# Altium PCB PCB-Mezzanine.PcbDoc (part 1 of 2)
Units mm, origin at the board's own origin, x right, y up, seen from the top; angles counter-clockwise.
Board outline 133.2 x 100 mm, 6 copper layers (Top Layer, Mid-Layer 1, Mid-Layer 2, Mid-Layer 3, Mid-Layer 4, Bottom Layer); 39 components, 252 nets, 1606 pads, 142 vias.
Unrouted connection lines stored in the file: 49.
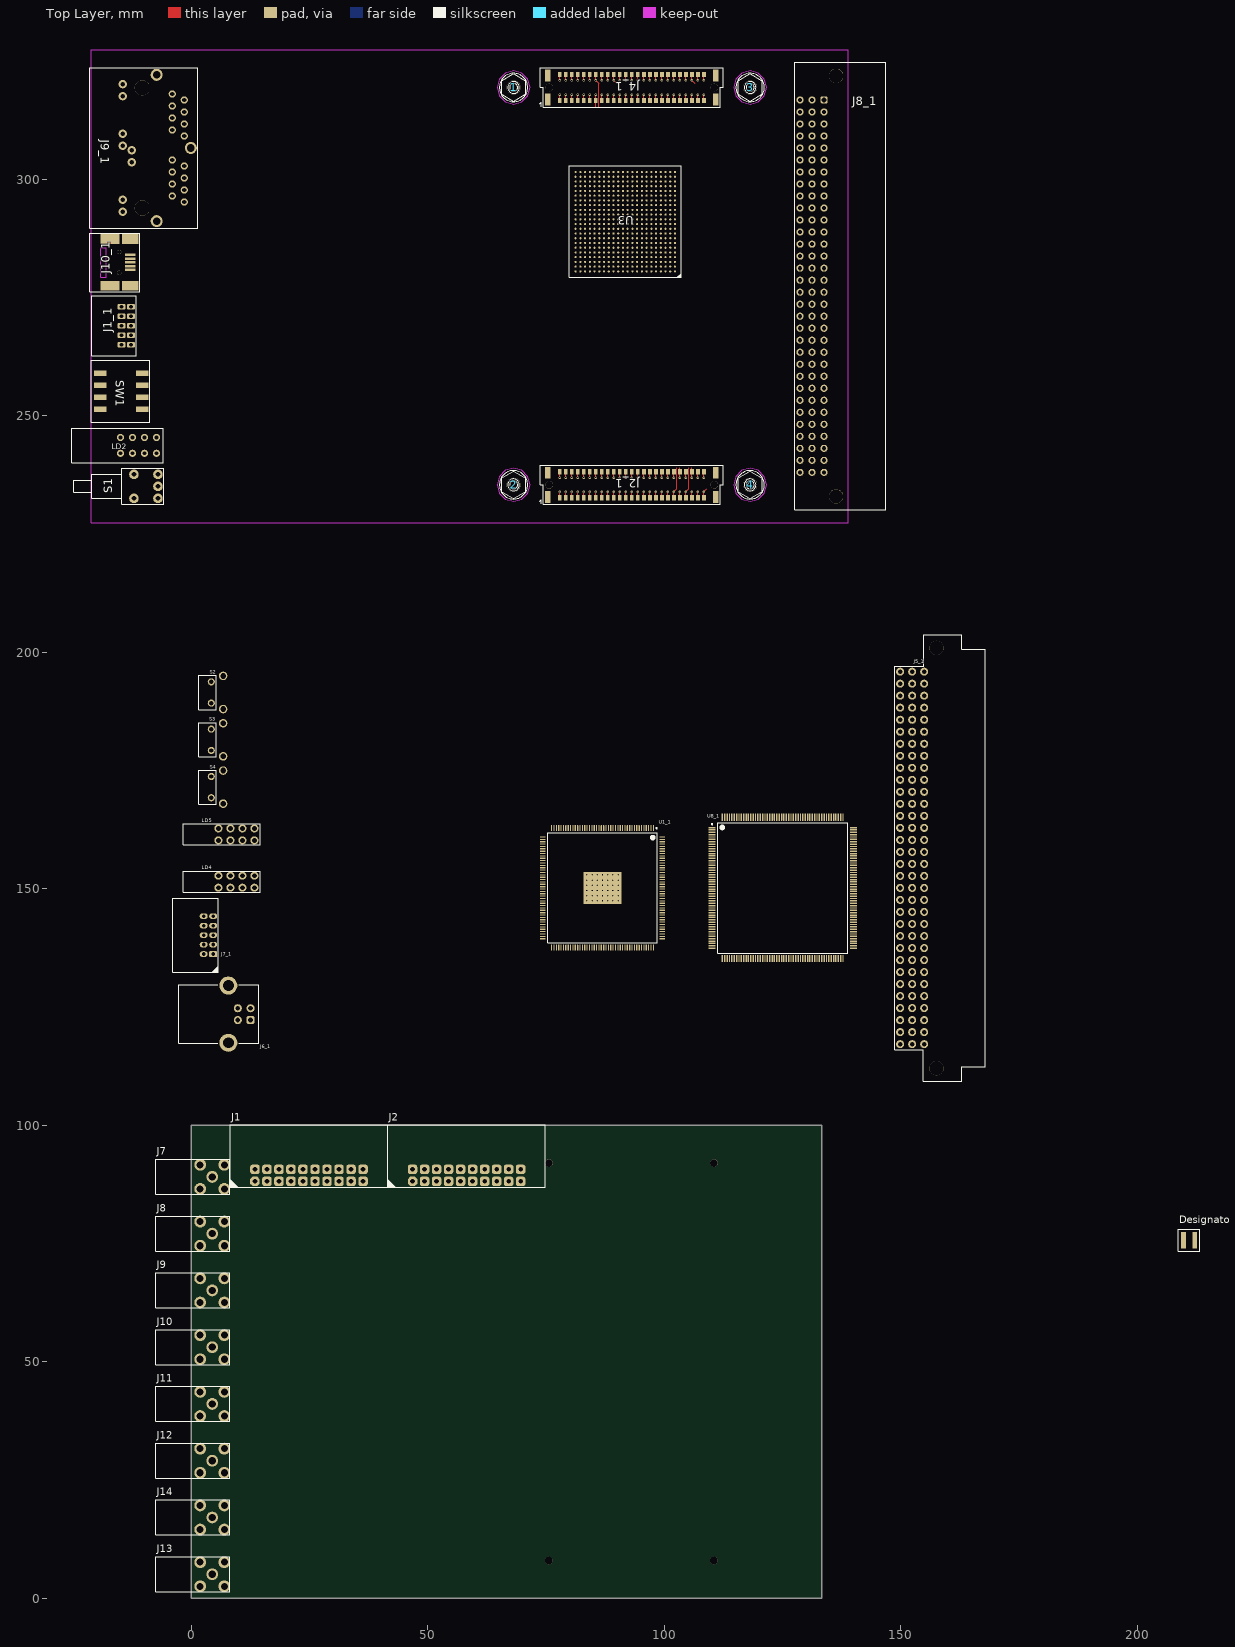
[diagram p0: Top Layer view]
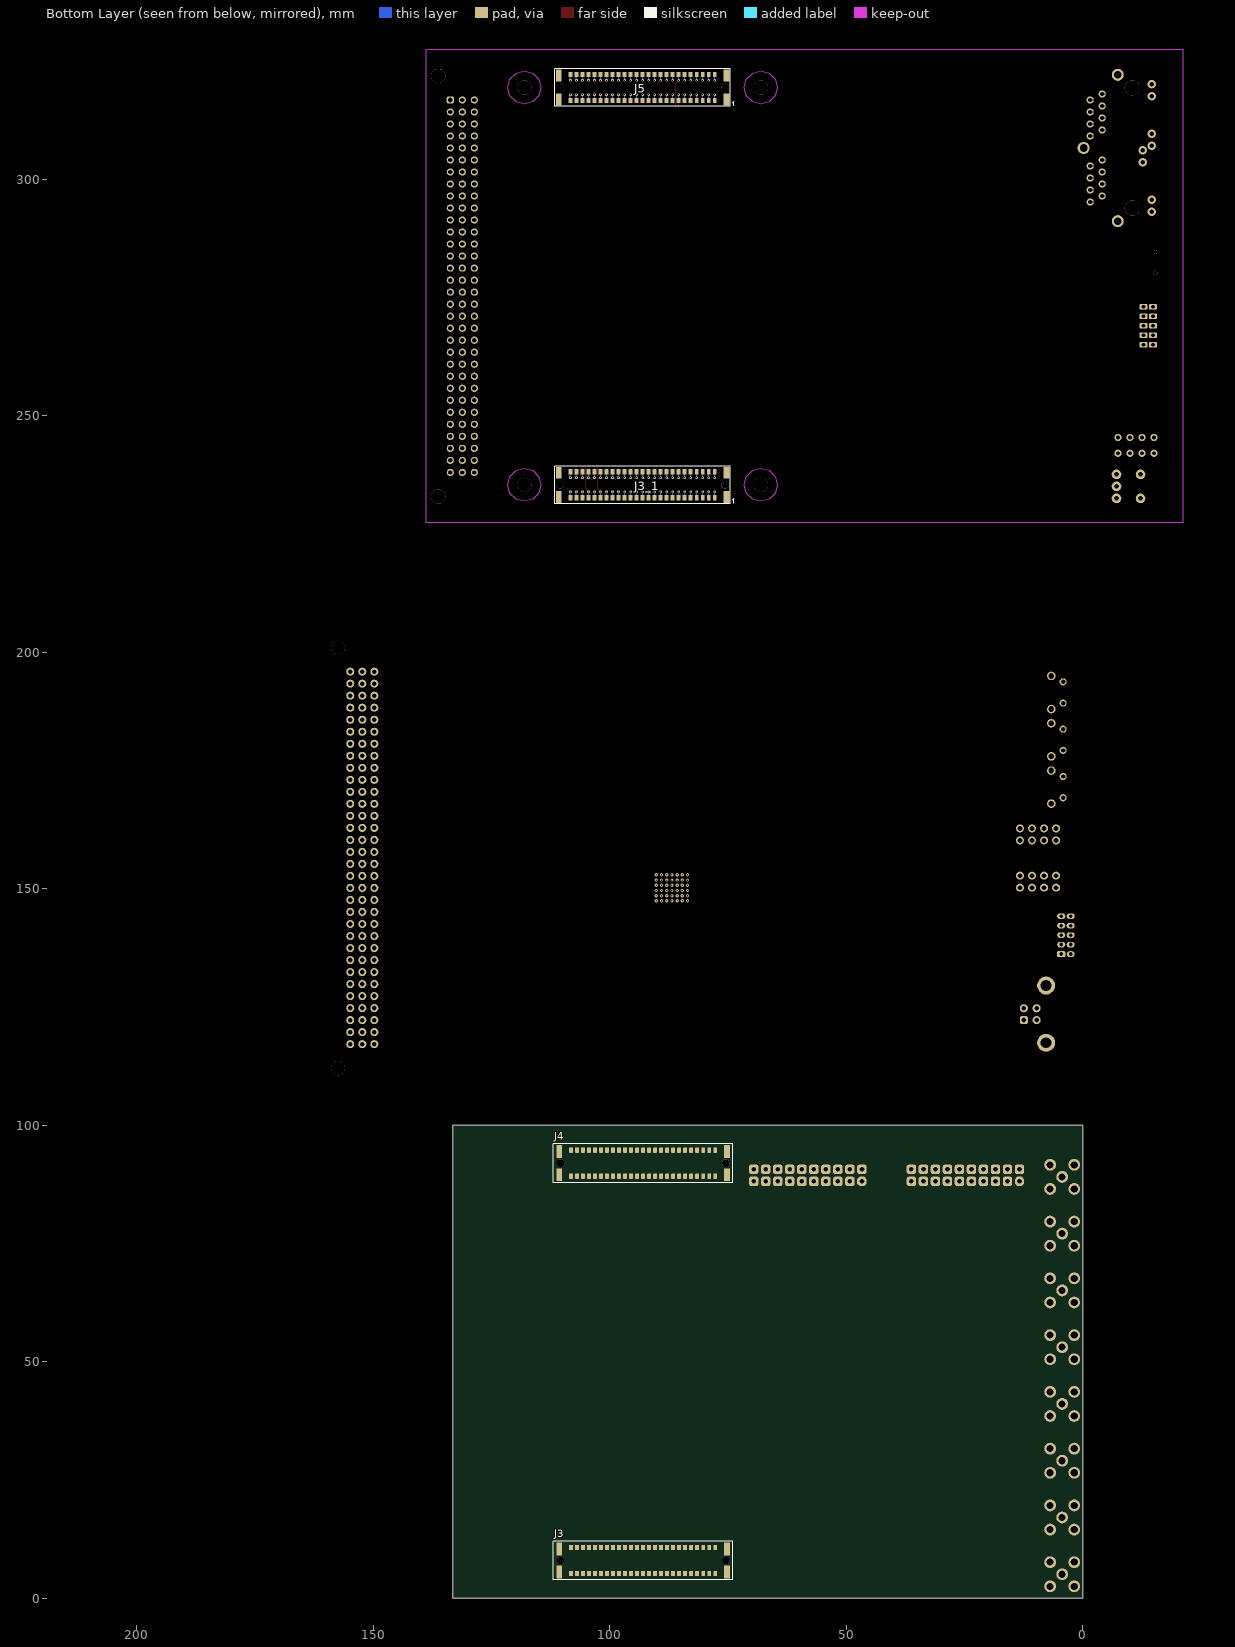
[diagram p1: Bottom Layer view, seen from below]
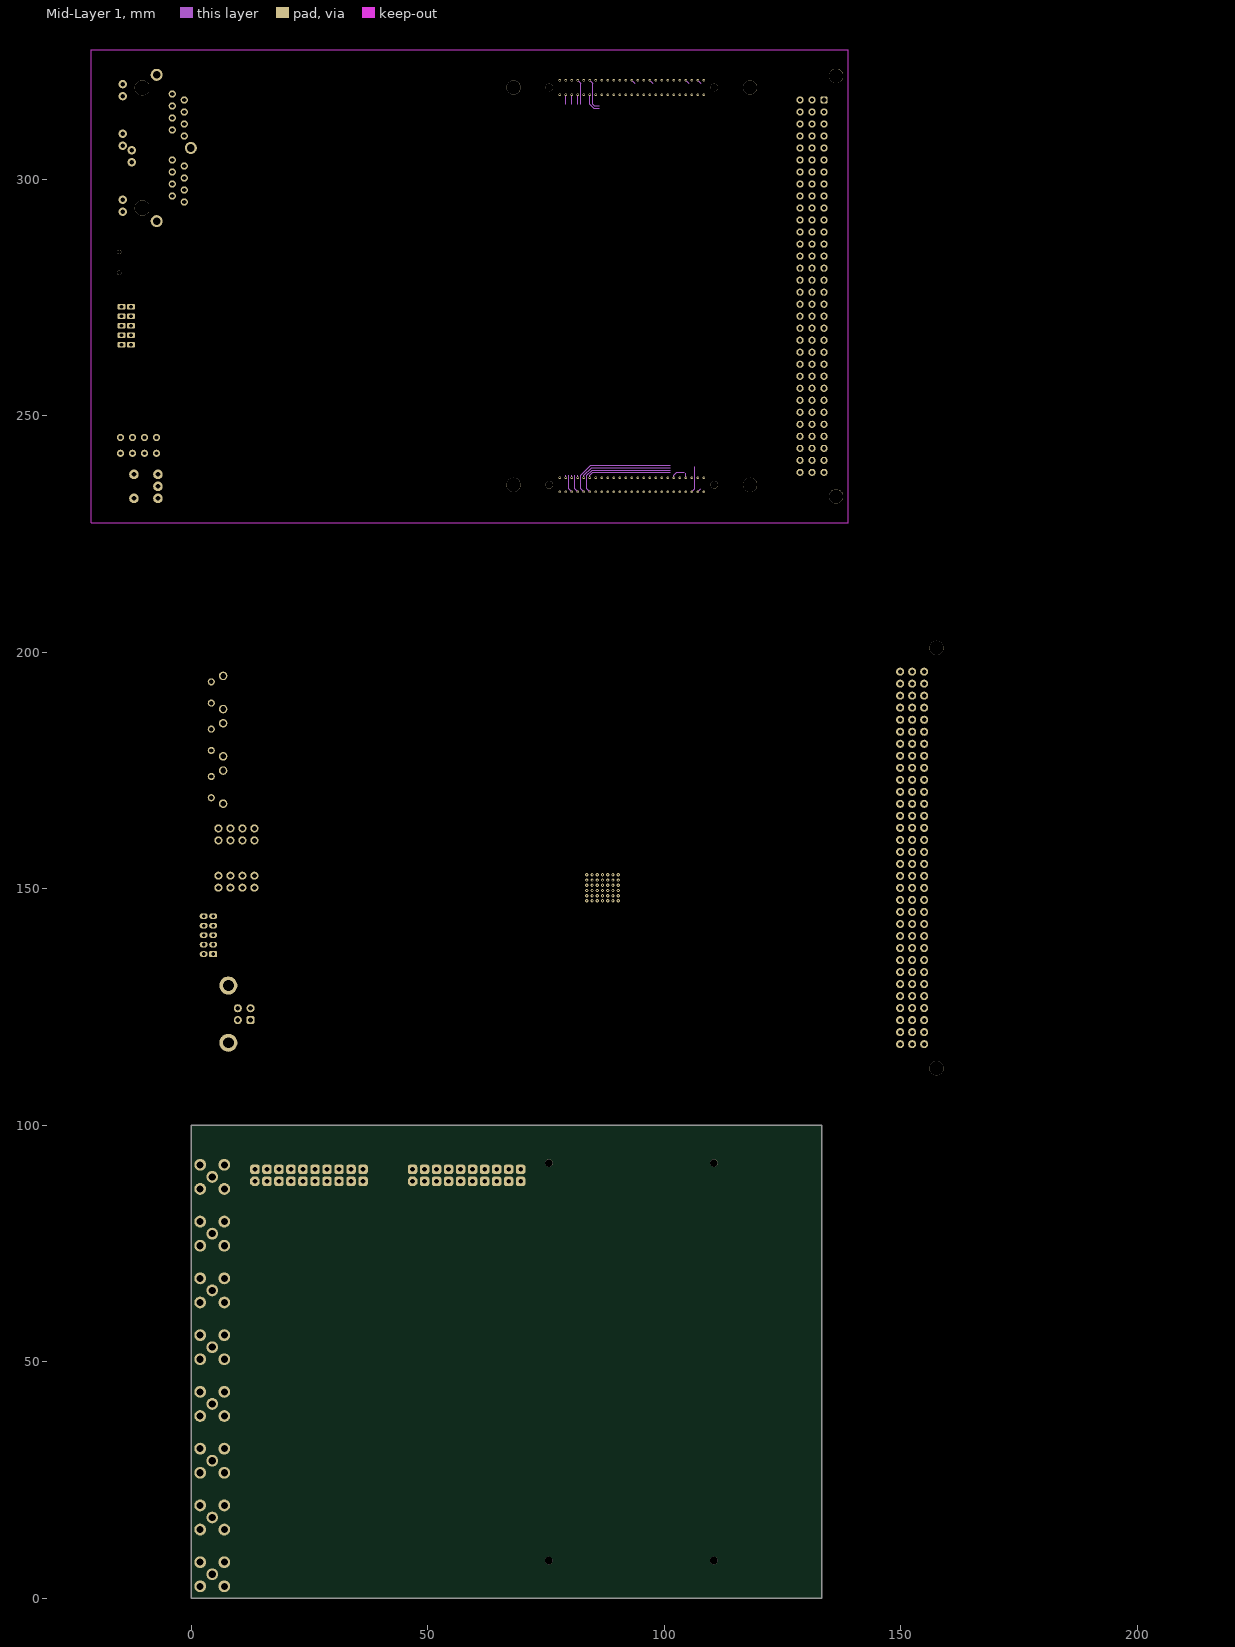
[diagram p2: Mid-Layer 1]
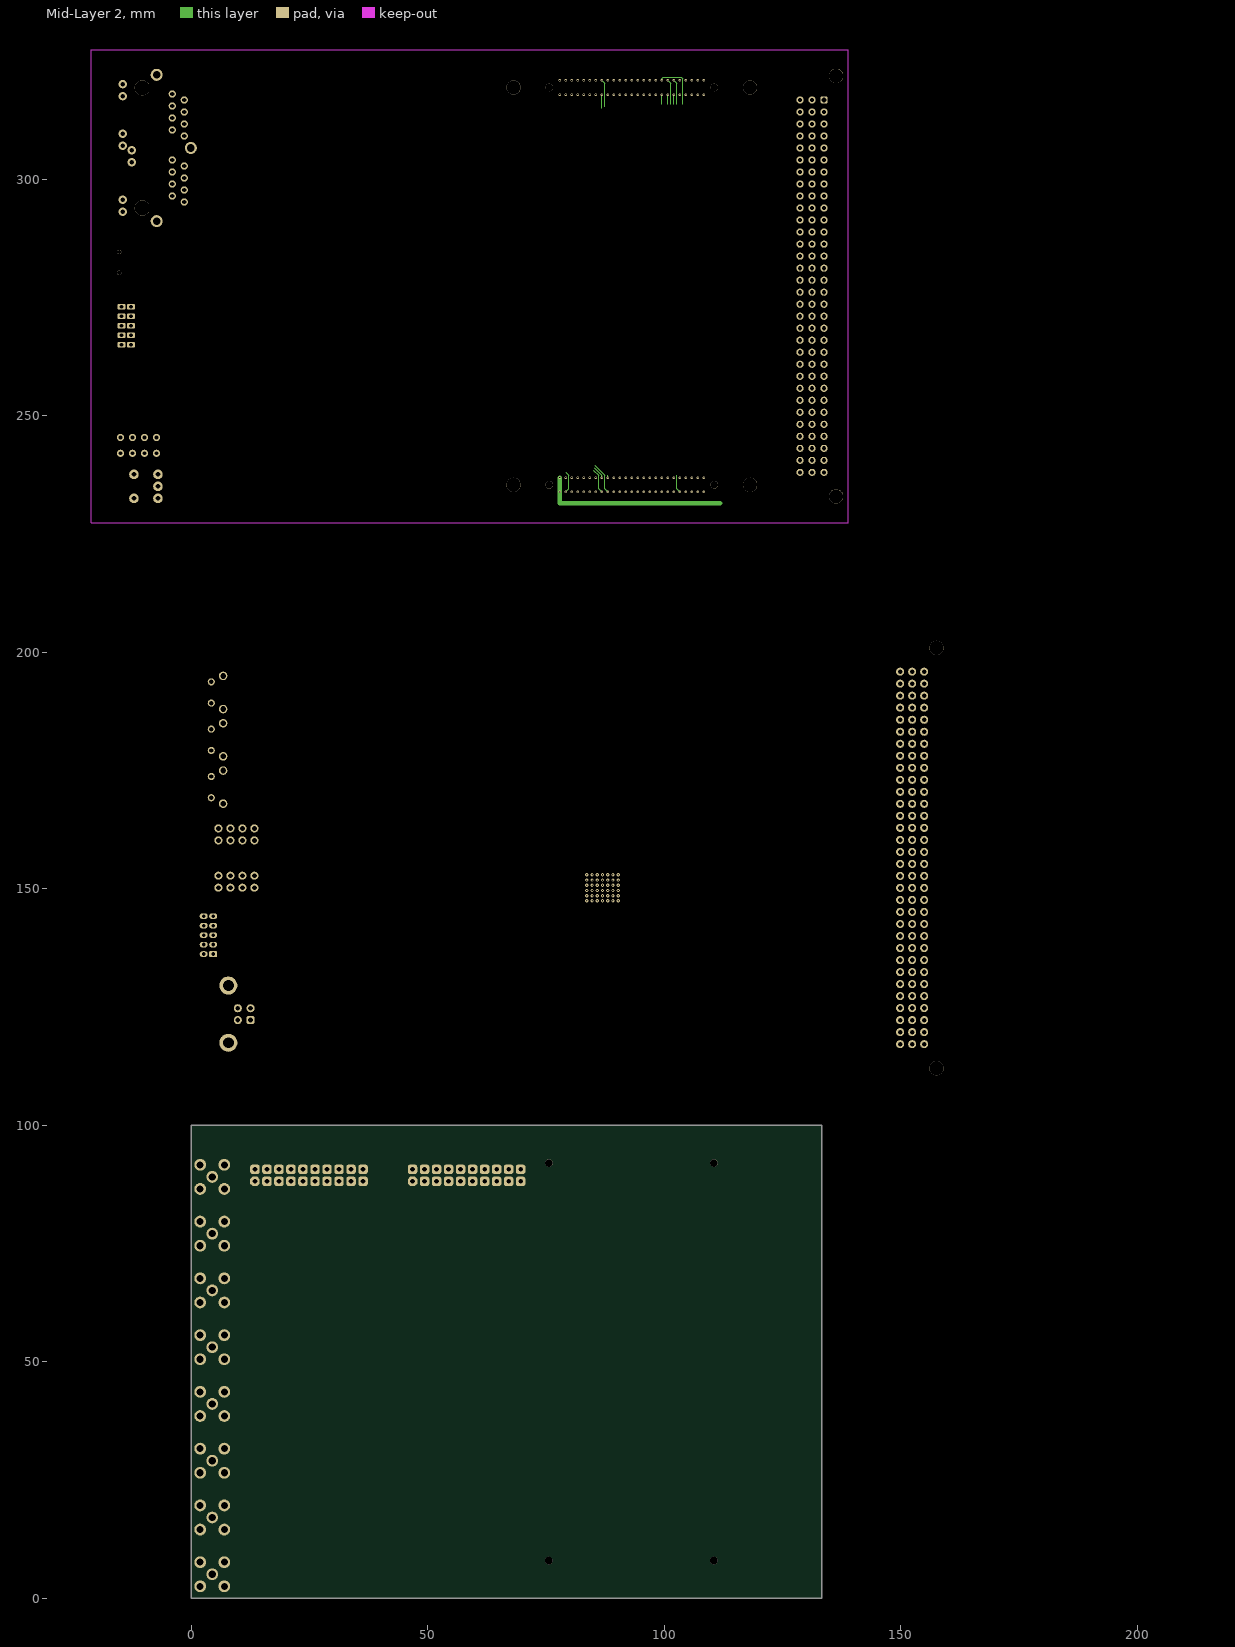
[diagram p3: Mid-Layer 2]
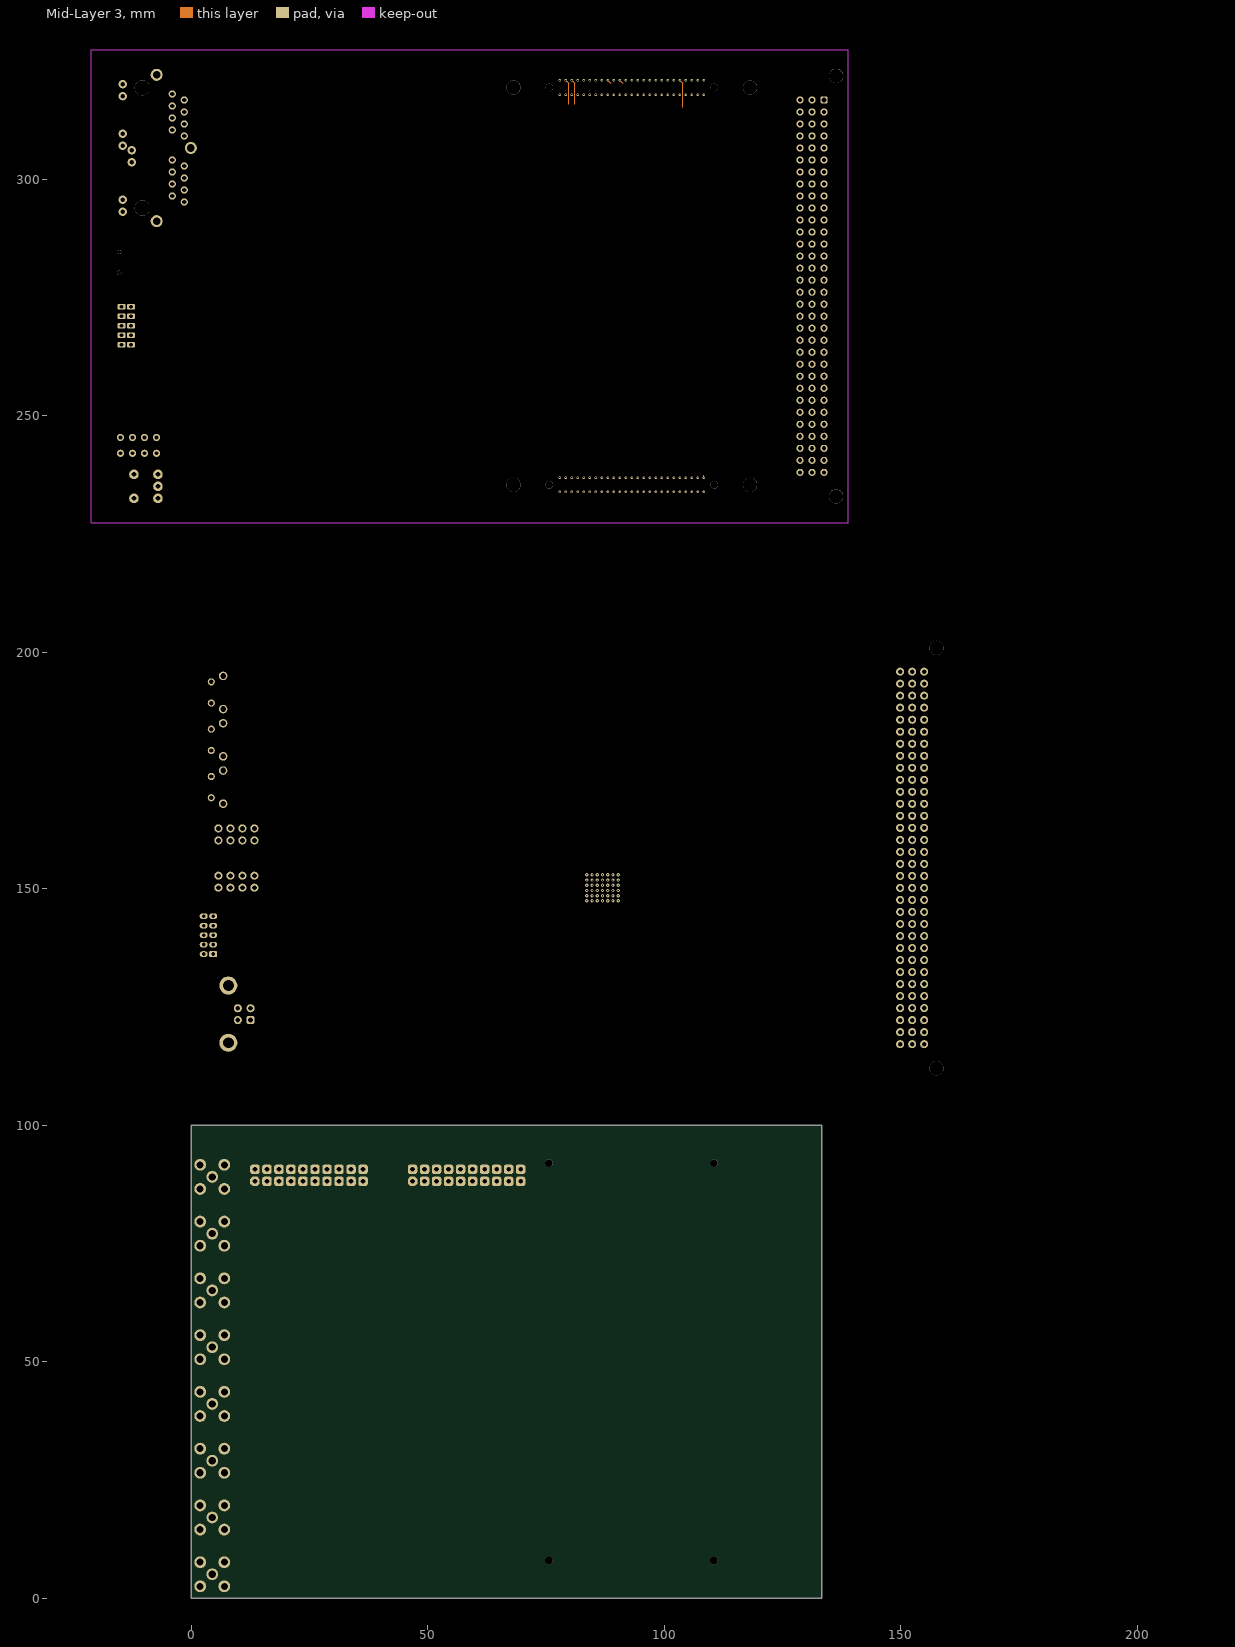
[diagram p4: Mid-Layer 3]
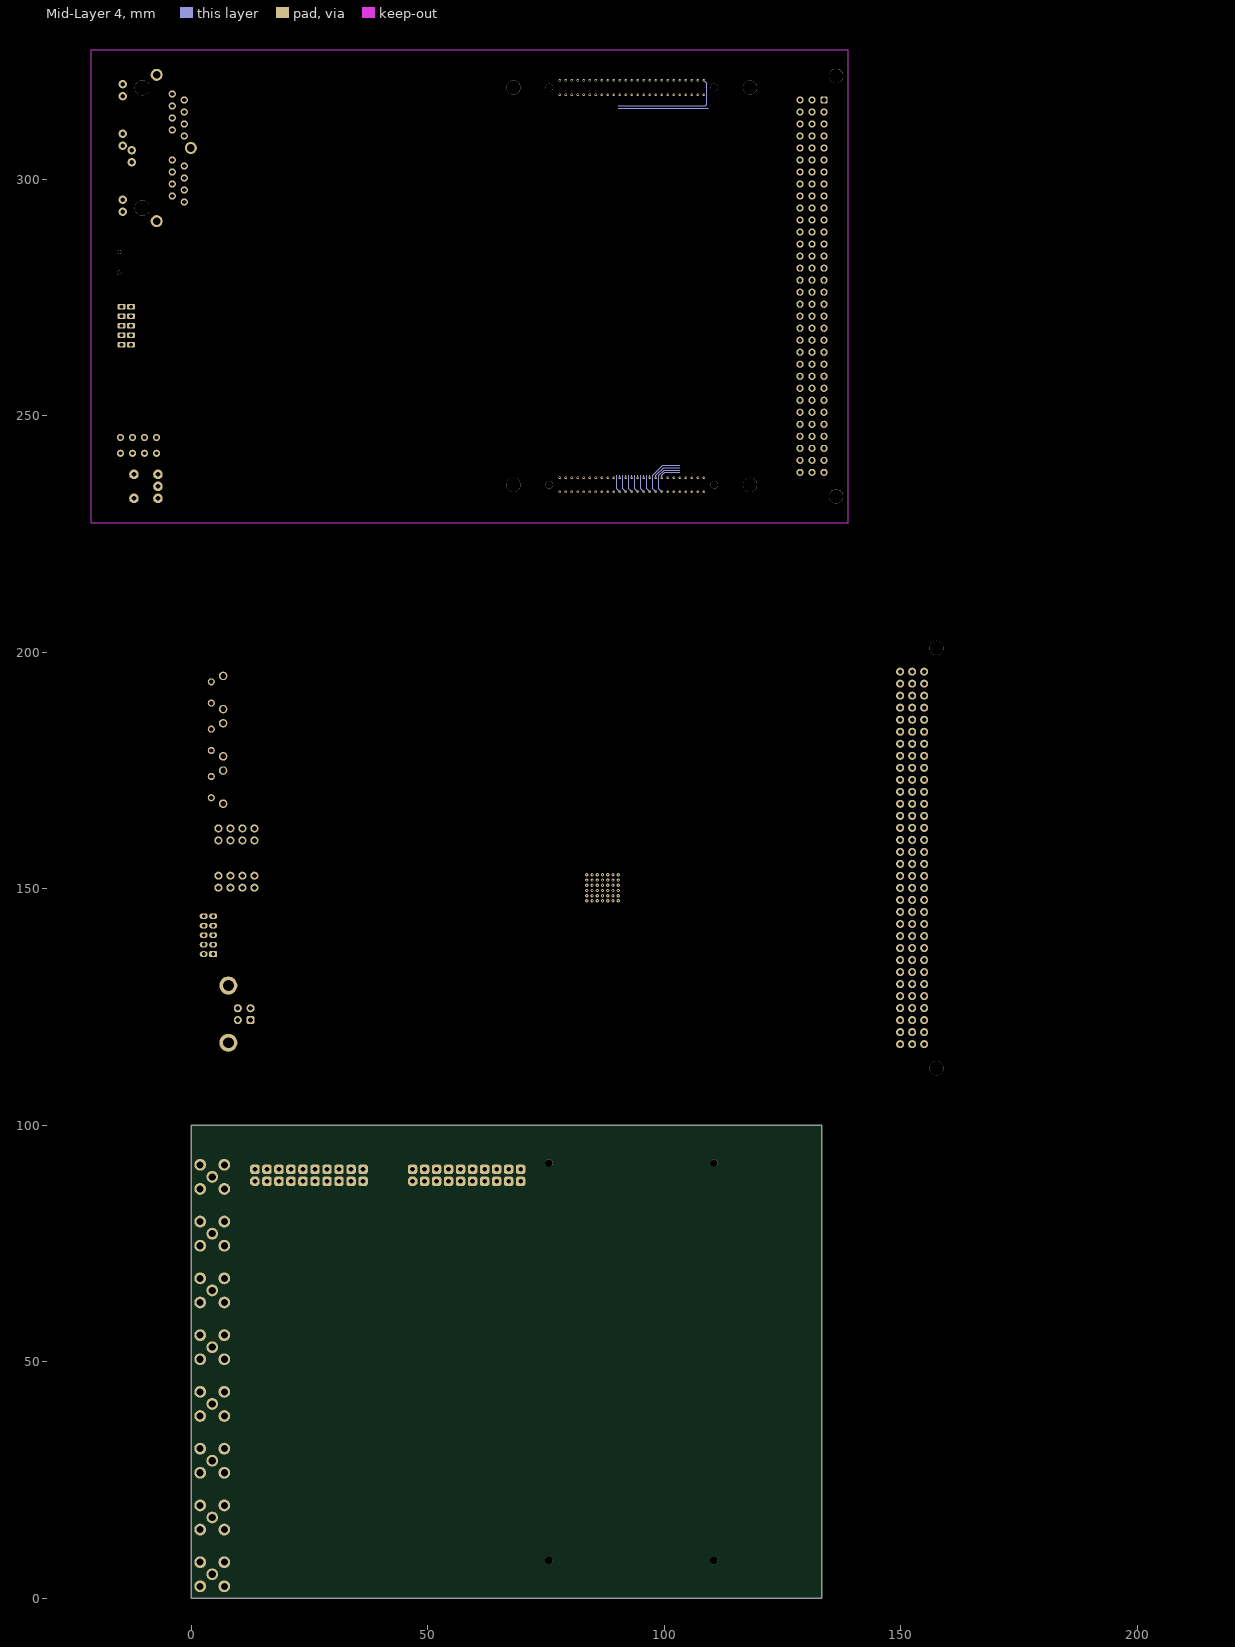
[diagram p5: Mid-Layer 4]

## Layer stack, top to bottom
Top Solder: solder mask 0.0102, Solder Resist, Dk 3.5
Top Layer: signal copper 0.0356
Dielectric 1: dielectric 0.32, FR-4, Dk 4.8
Mid-Layer 1: signal copper 0.0356
Dielectric2: dielectric 0.32, FR-4, Dk 4.8
Mid-Layer 2: signal copper 0.0356
Dielectric3: dielectric 0.32, FR-4, Dk 4.8
Mid-Layer 3: signal copper 0.0356
Dielectric4: dielectric 0.32, FR-4, Dk 4.8
Mid-Layer 4: signal copper 0.0356
Dielectric5: dielectric 0.32, FR-4, Dk 4.8
Bottom Layer: signal copper 0.0356
Bottom Solder: solder mask 0.0102, Solder Resist, Dk 3.5

## Board outline
0,0 133.2,0 133.2,100 0,100

## Design rules (kind name [scope] priority, off if disabled: settings)
Clearance [All] p1: gap=0.254 ignorepadtopadclearanceinfootprint=FALSE except(0: Arc-Hole Track-Hole SMDPad-Hole THPad-Hole Via-Hole Fill-Hole Poly-Hole Region-Hole Text-Hole)
DiffPairsRouting [All] p1: maxlimit=0.254 minlimit=0.254 mostfreqgap=0.254 toplayer_minwidth=0.381 toplayer_maxwidth=0.381 toplayer_prefwidth=0.381 midlayer1_minwidth=0.381 midlayer1_maxwidth=0.381 midlayer1_prefwidth=0.381 midlayer2_minwidth=0.381 midlayer2_maxwidth=0.381 midlayer2_prefwidth=0.381 midlayer3_minwidth=0.381 midlayer3_maxwidth=0.381 midlayer3_prefwidth=0.381 midlayer4_minwidth=0.381 midlayer4_maxwidth=0.381 midlayer4_prefwidth=0.381 bottomlayer_minwidth=0.381 bottomlayer_maxwidth=0.381 bottomlayer_prefwidth=0.381 maxuncoupledlength=12.7
PolygonConnect [All] p1: connectstyle=Relief reliefconductorwidth=0.254 reliefentries=4 polygonreliefangle="90 Angle" airgapwidth=0.254
RoutingVias [All] p1: holewidth=0.711 width=1.27 viastyle="Through Hole" minholewidth=0.4 minwidth=0.7 maxholewidth=0.4 maxwidth=0.7
SolderMaskExpansion [All] p1: expansion=0.102
Width [All] p1: maxlimit=0.254 minlimit=0.254 preferedwidth=0.254
29 further rules are at their usual default settings.

## Classes and differential pairs
component class Supply_0: R137 R138 R139 R140 R141 TP1 TP2 U34
component class DAC_0: J7 J8 J9 J10 J11 J12 J13 J14 R121 R122 R123 R124 R125 R126 R127 R128 R129 R130 R131 R132 R133 R134 R135 R136 U30 U33
component class Connector_0: J1 J2 J3 J4
component class AD_3: U24
differential pair MEAS_19: +MEAS_19_P -MEAS_19_N
differential pair MEAS_18: +MEAS_18_P -MEAS_18_N
differential pair MEAS_17: +MEAS_17_P -MEAS_17_N
differential pair MEAS_16: +MEAS_16_P -MEAS_16_N
differential pair MEAS_15: +MEAS_15_P -MEAS_15_N
differential pair MEAS_14: +MEAS_14_P -MEAS_14_N
differential pair MEAS_13: +MEAS_13_P -MEAS_13_N
differential pair MEAS_12: +MEAS_12_P -MEAS_12_N
differential pair MEAS_11: +MEAS_11_P -MEAS_11_N
differential pair MEAS_10: +MEAS_10_P -MEAS_10_N
differential pair MEAS_9: +MEAS_9_P -MEAS_9_N
differential pair MEAS_8: +MEAS_8_P -MEAS_8_N
differential pair MEAS_7: +MEAS_7_P -MEAS_7_N
differential pair MEAS_6: +MEAS_6_P -MEAS_6_N
differential pair MEAS_5: +MEAS_5_P -MEAS_5_N
differential pair MEAS_4: +MEAS_4_P -MEAS_4_N
differential pair MEAS_3: +MEAS_3_P -MEAS_3_N
differential pair MEAS_2: +MEAS_2_P -MEAS_2_N
differential pair MEAS_1: +MEAS_1_P -MEAS_1_N
differential pair MEAS_0: +MEAS_0_P -MEAS_0_N

## Components (designator, comment, footprint, x,y, rotation, side; value= is the part's Value field where it differs from the comment)
1 "" "UNCONNECTED NUT M2.5" 68.104,319.399 r0 top locked
2 "" "UNCONNECTED NUT M2.5" 68.104,235.399 r0 top locked
3 "" "UNCONNECTED NUT M2.5" 118.104,319.399 r0 top locked
4 "" "UNCONNECTED NUT M2.5" 118.104,235.399 r0 top locked
Designator24 "Comment" XFL4020 210.9,75.7 r180 top
J1 "61202021621" "FlatCable2x10 2.54MM RIGHT ANGLE TH" 24.85,89.43 r180 top
J1_1 "{Value}" CONN2X5-2MM-FCI-COUDE -12.776,265.029 r90 top
J2 "61202021621" "FlatCable2x10 2.54MM RIGHT ANGLE TH" 58.17,89.43 r180 top
J2_1 "{Value}" ERNI-SMC-50P-FD_ERNI-SMC-50P-FD(Primary) 93.104,235.4 r90 top locked
J3 "ERNI SMC-Q50-SMD-BA" "ERNI SMC-Q50-SMD-BA" 93,8 r180 bottom locked
J3_1 "{Value}" ERNI-SMC-50P-MD_ERNI-SMC-50P-MD(Primary) 93.104,235.4 r270 bottom locked
J4 "ERNI SMC-Q50-SMD-BA" "ERNI SMC-Q50-SMD-BA" 93,92 r180 bottom locked
J4_1 "{Value}" ERNI-SMC-50P-FD_ERNI-SMC-50P-FD(Primary) 93.104,319.398 r90 top locked
J5 "{Value}" ERNI-SMC-50P-MD_ERNI-SMC-50P-MD(Primary) 93.104,319.398 r270 bottom locked
J5_1 "09031966921" "DIN41612 MALE 3X32 ABC R90" 167.6,156.5 r270 top (schematic designator J5)
J6_1 "UE27-BC54-130" "USB-B TH AMPHENOL UE27-BC54-130" -2.5,123.5 r270 top (schematic designator J6)
J7 "CONSMA002-G" "SMA TH Right Angle Linx CONSMA002" 4.4,89.1 r0 top locked
J7_1 "98464-G61-10ULF" "FlatCable2x5 2MM Right Angle TH FCI 98614-G61-10ULF" 3.6,140.2 r270 top (schematic designator J7)
J8 "CONSMA002-G" "SMA TH Right Angle Linx CONSMA002" 4.4,77.1 r0 top locked
J8_1 "" CONN3X32_DIN41612-3X32FC(Primary) 133.744,316.769 r0 top
J9 "CONSMA002-G" "SMA TH Right Angle Linx CONSMA002" 4.4,65.1 r0 top locked
J9_1 "" RJ45-PULSE-J8064D628ANL -21.196,306.609 r270 top
J10 "CONSMA002-G" "SMA TH Right Angle Linx CONSMA002" 4.4,53.1 r0 top locked
J10_1 "USB Mini" USB-MINI-B-SMD -21.176,282.429 r0 top
J11 "CONSMA002-G" "SMA TH Right Angle Linx CONSMA002" 4.4,41.1 r0 top locked
J12 "CONSMA002-G" "SMA TH Right Angle Linx CONSMA002" 4.4,29.1 r0 top locked
J13 "CONSMA002-G" "SMA TH Right Angle Linx CONSMA002" 4.4,5.1 r0 top locked
J14 "CONSMA002-G" "SMA TH Right Angle Linx CONSMA002" 4.4,17.1 r0 top locked
LD2 "User Led" LED-569-010X-XXX -21.196,243.744 r0 top
LD4 "568-0721-111F" "LED Dialight 568-0721-111" 5.7,151.5 r0 top
LD5 "568-0721-111F" "LED Dialight 568-0721-111" 5.7,161.5 r0 top
S1 "Reset Button" PUSHBUTTON-03_PUSHBUTT-SH3-01(Primary) -7.08,232.544 r90 top
S2 "FSMRA4JH04" "Push Button C7.1x3.7 TE FSMRA4JH" 1.6,191.5 r270 top
S3 "FSMRA4JH04" "Push Button C7.1x3.7 TE FSMRA4JH" 1.6,181.5 r270 top
S4 "FSMRA4JH04" "Push Button C7.1x3.7 TE FSMRA4JH" 1.6,171.5 r270 top
SW1 "" SW-CTS-193-4MS -19.291,258.984 r270 top
U1_1 "TMS320F28377SPTPT" "PQFP176 P0.5 C24.2X24.2 H1.5" 86.9,150.2 r270 top (schematic designator U1)
U3 "XC6SLX45 / 100 / 150" "BGA23X23-FG484_XC6SLX150 FGG484(Primary)" 102.224,280.529 r180 top
U8_1 "XC2C256-7PQG208C" "PQFP208 P0.5 C28.0X28.0 H3.7" 125,150.2 r0 top (schematic designator U8)

## Footprints (in the part's own frame and the unit in brackets; to place one, negate y for a bottom-side part, rotate by r counter-clockwise, add the part's x,y. Pads: shape width x height; smd on the part's side, far side on the other; paste and mask are expansions set on the pad)
"BGA23X23-FG484_XC6SLX150 FGG484(Primary)" [mm]
  round 0.45 smd: A1(0,0) A2(1,0) A3(2,0) A4(3,0) A5(4,0) A6(5,0) A7(6,0) A8(7,0) A9(8,0) A10(9,0) A11(10,0) A12(11,0) A13(12,0) A14(13,0) A15(14,0) A16(15,0) A17(16,0) A18(17,0) A19(18,0) A20(19,0) A21(20,0) A22(21,0) AA1(0,-20) AA2(1,-20) AA3(2,-20) AA4(3,-20) AA5(4,-20) AA6(5,-20) AA7(6,-20) AA8(7,-20) AA9(8,-20) AA10(9,-20) AA11(10,-20) AA12(11,-20) AA13(12,-20) AA14(13,-20) AA15(14,-20) AA16(15,-20) AA17(16,-20) AA18(17,-20) AA19(18,-20) AA20(19,-20) AA21(20,-20) AA22(21,-20) AB1(0,-21) AB2(1,-21) AB3(2,-21) AB4(3,-21) AB5(4,-21) AB6(5,-21) AB7(6,-21) AB8(7,-21) AB9(8,-21) AB10(9,-21) AB11(10,-21) AB12(11,-21) AB13(12,-21) AB14(13,-21) AB15(14,-21) AB16(15,-21) AB17(16,-21) AB18(17,-21) AB19(18,-21) AB20(19,-21) AB21(20,-21) AB22(21,-21) B1(0,-1) B2(1,-1) B3(2,-1) B4(3,-1) B5(4,-1) B6(5,-1) B7(6,-1) B8(7,-1) B9(8,-1) B10(9,-1) B11(10,-1) B12(11,-1) B13(12,-1) B14(13,-1) B15(14,-1) B16(15,-1) B17(16,-1) B18(17,-1) B19(18,-1) B20(19,-1) B21(20,-1) B22(21,-1) C1(0,-2) C2(1,-2) C3(2,-2) C4(3,-2) C5(4,-2) C6(5,-2) C7(6,-2) C8(7,-2) C9(8,-2) C10(9,-2) C11(10,-2) C12(11,-2) C13(12,-2) C14(13,-2) C15(14,-2) C16(15,-2) C17(16,-2) C18(17,-2) C19(18,-2) C20(19,-2) C21(20,-2) C22(21,-2) D1(0,-3) D2(1,-3) D3(2,-3) D4(3,-3) D5(4,-3) D6(5,-3) D7(6,-3) D8(7,-3) D9(8,-3) D10(9,-3) D11(10,-3) D12(11,-3) D13(12,-3) D14(13,-3) D15(14,-3) D16(15,-3) D17(16,-3) D18(17,-3) D19(18,-3) D20(19,-3) D21(20,-3) D22(21,-3) E1(0,-4) E2(1,-4) E3(2,-4) E4(3,-4) E5(4,-4) E6(5,-4) E7(6,-4) E8(7,-4) E9(8,-4) E10(9,-4) E11(10,-4) E12(11,-4) E13(12,-4) E14(13,-4) E15(14,-4) E16(15,-4) E17(16,-4) E18(17,-4) E19(18,-4) E20(19,-4) E21(20,-4) E22(21,-4) F1(0,-5) F2(1,-5) F3(2,-5) F4(3,-5) F5(4,-5) F6(5,-5) F7(6,-5) F8(7,-5) F9(8,-5) F10(9,-5) F11(10,-5) F12(11,-5) F13(12,-5) F14(13,-5) F15(14,-5) F16(15,-5) F17(16,-5) F18(17,-5) F19(18,-5) F20(19,-5) F21(20,-5) F22(21,-5) G1(0,-6) G2(1,-6) G3(2,-6) G4(3,-6) G5(4,-6) G6(5,-6) G7(6,-6) G8(7,-6) G9(8,-6) G10(9,-6) G11(10,-6) G12(11,-6) G13(12,-6) G14(13,-6) G15(14,-6) G16(15,-6) G17(16,-6) G18(17,-6) G19(18,-6) G20(19,-6) G21(20,-6) G22(21,-6) H1(0,-7) H2(1,-7) H3(2,-7) H4(3,-7) H5(4,-7) H6(5,-7) H7(6,-7) H8(7,-7) H9(8,-7) H10(9,-7) H11(10,-7) H12(11,-7) H13(12,-7) H14(13,-7) H15(14,-7) H16(15,-7) H17(16,-7) H18(17,-7) H19(18,-7) H20(19,-7) H21(20,-7) H22(21,-7) J1(0,-8) J2(1,-8) J3(2,-8) J4(3,-8) J5(4,-8) J6(5,-8) J7(6,-8) J8(7,-8) J9(8,-8) J10(9,-8) J11(10,-8) J12(11,-8) J13(12,-8) J14(13,-8) J15(14,-8) J16(15,-8) J17(16,-8) J18(17,-8) J19(18,-8) J20(19,-8) J21(20,-8) J22(21,-8) K1(0,-9) K2(1,-9) K3(2,-9) K4(3,-9) K5(4,-9) K6(5,-9) K7(6,-9) K8(7,-9) K9(8,-9) K10(9,-9) K11(10,-9) K12(11,-9) K13(12,-9) K14(13,-9) K15(14,-9) K16(15,-9) K17(16,-9) K18(17,-9) K19(18,-9) K20(19,-9) K21(20,-9) K22(21,-9) L1(0,-10) L2(1,-10) L3(2,-10) L4(3,-10) L5(4,-10) L6(5,-10) L7(6,-10) L8(7,-10) L9(8,-10) L10(9,-10) L11(10,-10) L12(11,-10) L13(12,-10) L14(13,-10) L15(14,-10) L16(15,-10) L17(16,-10) L18(17,-10) L19(18,-10) L20(19,-10) L21(20,-10) L22(21,-10) M1(0,-11) M2(1,-11) M3(2,-11) M4(3,-11) M5(4,-11) M6(5,-11) M7(6,-11) M8(7,-11) M9(8,-11) M10(9,-11) M11(10,-11) M12(11,-11) M13(12,-11) M14(13,-11) M15(14,-11) M16(15,-11) M17(16,-11) M18(17,-11) M19(18,-11) M20(19,-11) M21(20,-11) M22(21,-11) N1(0,-12) N2(1,-12) N3(2,-12) N4(3,-12) N5(4,-12) N6(5,-12) N7(6,-12) N8(7,-12) N9(8,-12) N10(9,-12) N11(10,-12) N12(11,-12) N13(12,-12) N14(13,-12) N15(14,-12) N16(15,-12) N17(16,-12) N18(17,-12) N19(18,-12) N20(19,-12) N21(20,-12) N22(21,-12) P1(0,-13) P2(1,-13) P3(2,-13) P4(3,-13) P5(4,-13) P6(5,-13) P7(6,-13) P8(7,-13) P9(8,-13) P10(9,-13) P11(10,-13) P12(11,-13) P13(12,-13) P14(13,-13) P15(14,-13) P16(15,-13) P17(16,-13) P18(17,-13) P19(18,-13) P20(19,-13) P21(20,-13) P22(21,-13) R1(0,-14) R2(1,-14) R3(2,-14) R4(3,-14) R5(4,-14) R6(5,-14) R7(6,-14) R8(7,-14) R9(8,-14) R10(9,-14) R11(10,-14) R12(11,-14) R13(12,-14) R14(13,-14) R15(14,-14) R16(15,-14) R17(16,-14) R18(17,-14) R19(18,-14) R20(19,-14) R21(20,-14) R22(21,-14) T1(0,-15) T2(1,-15) T3(2,-15) T4(3,-15) T5(4,-15) T6(5,-15) T7(6,-15) T8(7,-15) T9(8,-15) T10(9,-15) T11(10,-15) T12(11,-15) T13(12,-15) T14(13,-15) T15(14,-15) T16(15,-15) T17(16,-15) T18(17,-15) T19(18,-15) T20(19,-15) T21(20,-15) T22(21,-15) U1(0,-16) U2(1,-16) U3(2,-16) U4(3,-16) U5(4,-16) U6(5,-16) U7(6,-16) U8(7,-16) U9(8,-16) U10(9,-16) U11(10,-16) U12(11,-16) U13(12,-16) U14(13,-16) U15(14,-16) U16(15,-16) U17(16,-16) U18(17,-16) U19(18,-16) U20(19,-16) U21(20,-16) U22(21,-16) V1(0,-17) V2(1,-17) V3(2,-17) V4(3,-17) V5(4,-17) V6(5,-17) V7(6,-17) V8(7,-17) V9(8,-17) V10(9,-17) V11(10,-17) V12(11,-17) V13(12,-17) V14(13,-17) V15(14,-17) V16(15,-17) V17(16,-17) V18(17,-17) V19(18,-17) V20(19,-17) V21(20,-17) V22(21,-17) W1(0,-18) W2(1,-18) W3(2,-18) W4(3,-18) W5(4,-18) W6(5,-18) W7(6,-18) W8(7,-18) W9(8,-18) W10(9,-18) W11(10,-18) W12(11,-18) W13(12,-18) W14(13,-18) W15(14,-18) W16(15,-18) W17(16,-18) W18(17,-18) W19(18,-18) W20(19,-18) W21(20,-18) W22(21,-18) Y1(0,-19) Y2(1,-19) Y3(2,-19) Y4(3,-19) Y5(4,-19) Y6(5,-19) Y7(6,-19) Y8(7,-19) Y9(8,-19) Y10(9,-19) Y11(10,-19) Y12(11,-19) Y13(12,-19) Y14(13,-19) Y15(14,-19) Y16(15,-19) Y17(16,-19) Y18(17,-19) Y19(18,-19) Y20(19,-19) Y21(20,-19) Y22(21,-19)
  silkscreen extent -1.3,-22.3 22.3,1.3
CONN2X5-2MM-FCI-COUDE [mm]
  rrect50% 1.219x1.727 hole 0.8: 1(0,0) 2(0,2) 3(2,0) 4(2,2) 5(4,0) 6(4,2) 7(6,0) 8(6,2) 9(8,0) 10(8,2)
  silkscreen extent -2.3,-1.1 10.3,8.3
CONN3X32_DIN41612-3X32FC(Primary) [mil]
  rrect50% 60x60 hole 39.37: 1a(0,0)
  round 60 hole 35.43: 1b(-100,0) 1c(-200,0) 2a(0,-100) 2b(-100,-100) 2c(-200,-100) 3a(0,-200) 3b(-100,-200) 3c(-200,-200) 4a(0,-300) 4b(-100,-300) 4c(-200,-300) 5a(0,-400) 5b(-100,-400) 5c(-200,-400) 6a(0,-500) 6b(-100,-500) 6c(-200,-500) 7a(0,-600) 7b(-100,-600) 7c(-200,-600) 8a(0,-700) 8b(-100,-700) 8c(-200,-700) 9a(0,-800) 9b(-100,-800) 9c(-200,-800) 10a(0,-900) 10b(-100,-900) 10c(-200,-900) 11a(0,-1000) 11b(-100,-1000) 11c(-200,-1000) 12a(0,-1100) 12b(-100,-1100) 12c(-200,-1100) 13a(0,-1200) 13b(-100,-1200) 13c(-200,-1200) 14a(0,-1300) 14b(-100,-1300) 14c(-200,-1300) 15a(0,-1400) 15b(-100,-1400) 15c(-200,-1400) 16a(0,-1500) 16b(-100,-1500) 16c(-200,-1500) 17a(0,-1600) 17b(-100,-1600) 17c(-200,-1600) 18a(0,-1700) 18b(-100,-1700) 18c(-200,-1700) 19a(0,-1800) 19b(-100,-1800) 19c(-200,-1800) 20a(0,-1900) 20b(-100,-1900) 20c(-200,-1900) 21a(0,-2000) 21b(-100,-2000) 21c(-200,-2000) 22a(0,-2100) 22b(-100,-2100) 22c(-200,-2100) 23a(0,-2200) 23b(-100,-2200) 23c(-200,-2200) 24a(0,-2300) 24b(-100,-2300) 24c(-200,-2300) 25a(0,-2400) 25b(-100,-2400) 25c(-200,-2400) 26a(0,-2500) 26b(-100,-2500) 26c(-200,-2500) 27a(0,-2600) 27b(-100,-2600) 27c(-200,-2600) 28a(0,-2700) 28b(-100,-2700) 28c(-200,-2700) 29a(0,-2800) 29b(-100,-2800) 29c(-200,-2800) 30a(0,-2900) 30b(-100,-2900) 30c(-200,-2900) 31a(0,-3000) 31b(-100,-3000) 31c(-200,-3000) 32a(0,-3100) 32b(-100,-3100) 32c(-200,-3100)
  round 118.11 hole 118.11 paste-1000 mask-1000: 97(100,200) 98(100,-3300)
  silkscreen extent -244,-3412 512,312
"DIN41612 MALE 3X32 ABC R90" [mm] "DIN41612 MALE 3X32 ABC R90"
  round 3 hole 3 paste-25.4 mask-25.4: 0(-44.45,-10.1) 0(44.45,-10.1)
  round 1.7 hole 1: A1(-39.4,-12.7) A2(-36.86,-12.7) A3(-34.32,-12.7) A4(-31.78,-12.7) A5(-29.24,-12.7) A6(-26.7,-12.7) A7(-24.16,-12.7) A8(-21.62,-12.7) A9(-19.08,-12.7) A10(-16.54,-12.7) A11(-14,-12.7) A12(-11.46,-12.7) A13(-8.92,-12.7) A14(-6.38,-12.7) A15(-3.84,-12.7) A16(-1.3,-12.7) A17(1.24,-12.7) A18(3.78,-12.7) A19(6.32,-12.7) A20(8.86,-12.7) A21(11.4,-12.7) A22(13.94,-12.7) A23(16.48,-12.7) A24(19.02,-12.7) A25(21.56,-12.7) A26(24.1,-12.7) A27(26.64,-12.7) A28(29.18,-12.7) A29(31.72,-12.7) A30(34.26,-12.7) A31(36.8,-12.7) A32(39.34,-12.7) B1(-39.4,-15.24) B2(-36.86,-15.24) B3(-34.32,-15.24) B4(-31.78,-15.24) B5(-29.24,-15.24) B6(-26.7,-15.24) B7(-24.16,-15.24) B8(-21.62,-15.24) B9(-19.08,-15.24) B10(-16.54,-15.24) B11(-14,-15.24) B12(-11.46,-15.24) B13(-8.92,-15.24) B14(-6.38,-15.24) B15(-3.84,-15.24) B16(-1.3,-15.24) B17(1.24,-15.24) B18(3.78,-15.24) B19(6.32,-15.24) B20(8.86,-15.24) B21(11.4,-15.24) B22(13.94,-15.24) B23(16.48,-15.24) B24(19.02,-15.24) B25(21.56,-15.24) B26(24.1,-15.24) B27(26.64,-15.24) B28(29.18,-15.24) B29(31.72,-15.24) B30(34.26,-15.24) B31(36.8,-15.24) B32(39.34,-15.24) C1(-39.4,-17.78) C2(-36.86,-17.78) C3(-34.32,-17.78) C4(-31.78,-17.78) C5(-29.24,-17.78) C6(-26.7,-17.78) C7(-24.16,-17.78) C8(-21.62,-17.78) C9(-19.08,-17.78) C10(-16.54,-17.78) C11(-14,-17.78) C12(-11.46,-17.78) C13(-8.92,-17.78) C14(-6.38,-17.78) C15(-3.84,-17.78) C16(-1.3,-17.78) C17(1.24,-17.78) C18(3.78,-17.78) C19(6.32,-17.78) C20(8.86,-17.78) C21(11.4,-17.78) C22(13.94,-17.78) C23(16.48,-17.78) C24(19.02,-17.78) C25(21.56,-17.78) C26(24.1,-17.78) C27(26.64,-17.78) C28(29.18,-17.78) C29(31.72,-17.78) C30(34.26,-17.78) C31(36.8,-17.78) C32(39.34,-17.78)
  silkscreen extent -47.2,-18.9 47.2,0.2, body extent -47,-18.08 47,0, height 9.5
"ERNI SMC-Q50-SMD-BA" [mm] "Male 1.27 pitch 2x20 pin connector, 6.75 height"
  rect 1.2x2.7 smd: 0(-17.75,-2.45) 0(-17.75,2.45) 0(17.75,-2.45) 0(17.75,2.45)
  round 1.6 hole 1.6 unplated: 0(-17.45,0) 0(17.45,0)
  rrect25% 0.8x1.1 smd: a1(15.24,-2.75) a1(15.24,-2.75) a2(13.97,-2.75) a3(12.7,-2.75) a4(11.43,-2.75) a5(10.16,-2.75) a6(8.89,-2.75) a7(7.62,-2.75) a8(6.35,-2.75) a9(5.08,-2.75) a10(3.81,-2.75) a11(2.54,-2.75) a12(1.27,-2.75) a13(0,-2.75) a14(-1.27,-2.75) a15(-2.54,-2.75) a16(-3.81,-2.75) a17(-5.08,-2.75) a18(-6.35,-2.75) a19(-7.62,-2.75) a20(-8.89,-2.75) a21(-10.16,-2.75) a22(-11.43,-2.75) a23(-12.7,-2.75) a24(-13.97,-2.75) a25(-15.24,-2.75) b1(15.24,2.75) b1(15.24,2.75) b2(13.97,2.75) b3(12.7,2.75) b4(11.43,2.75) b5(10.16,2.75) b6(8.89,2.75) b7(7.62,2.75) b8(6.35,2.75) b9(5.08,2.75) b10(3.81,2.75) b11(2.54,2.75) b12(1.27,2.75) b13(0,2.75) b14(-1.27,2.75) b15(-2.54,2.75) b16(-3.81,2.75) b17(-5.08,2.75) b18(-6.35,2.75) b19(-7.62,2.75) b20(-8.89,2.75) b21(-10.16,2.75) b22(-11.43,2.75) b23(-12.7,2.75) b24(-13.97,2.75) b25(-15.24,2.75)
  silkscreen extent -19,-4.1 19,4.1, body extent -18.42,-3.5 18.41,3.5, height 6.8
ERNI-SMC-50P-FD_ERNI-SMC-50P-FD(Primary) [mm]
  rect 2.5x1.2 smd: 51(-2.55,17.75) 52(2.55,17.75) 53(-2.55,-17.75) 54(2.55,-17.75)
  round 1.6 hole 1.6 paste-25.4 mask-25.4: 55(0,17.45) 56(0,-17.45)
  rect 1.1x0.8 smd: a1(-2.75,15.24) a2(-2.75,13.97) a3(-2.75,12.7) a4(-2.75,11.43) a5(-2.75,10.16) a6(-2.75,8.89) a7(-2.75,7.62) a8(-2.75,6.35) a9(-2.75,5.08) a10(-2.75,3.81) a11(-2.75,2.54) a12(-2.75,1.27) a13(-2.75,0) a14(-2.75,-1.27) a15(-2.75,-2.54) a16(-2.75,-3.81) a17(-2.75,-5.08) a18(-2.75,-6.35) a19(-2.75,-7.62) a20(-2.75,-8.89) a21(-2.75,-10.16) a22(-2.75,-11.43) a23(-2.75,-12.7) a24(-2.75,-13.97) a25(-2.75,-15.24) b1(2.75,15.24) b2(2.75,13.97) b3(2.75,12.7) b4(2.75,11.43) b5(2.75,10.16) b6(2.75,8.89) b7(2.75,7.62) b8(2.75,6.35) b9(2.75,5.08) b10(2.75,3.81) b11(2.75,2.54) b12(2.75,1.27) b13(2.75,0) b14(2.75,-1.27) b15(2.75,-2.54) b16(2.75,-3.81) b17(2.75,-5.08) b18(2.75,-6.35) b19(2.75,-7.62) b20(2.75,-8.89) b21(2.75,-10.16) b22(2.75,-11.43) b23(2.75,-12.7) b24(2.75,-13.97) b25(2.75,-15.24)
  silkscreen extent -4.13,-19.37 4.13,19.45
ERNI-SMC-50P-MD_ERNI-SMC-50P-MD(Primary) [mm]
  rect 2.5x1.2 smd: 51(2.55,17.75) 52(-2.55,17.75) 53(2.55,-17.75) 54(-2.55,-17.75)
  round 1.6 hole 1.6 paste-25.4 mask-25.4: 55(0,17.45) 56(0,-17.45)
  rect 1.1x0.8 smd: a1(2.75,15.24) a2(2.75,13.97) a3(2.75,12.7) a4(2.75,11.43) a5(2.75,10.16) a6(2.75,8.89) a7(2.75,7.62) a8(2.75,6.35) a9(2.75,5.08) a10(2.75,3.81) a11(2.75,2.54) a12(2.75,1.27) a13(2.75,0) a14(2.75,-1.27) a15(2.75,-2.54) a16(2.75,-3.81) a17(2.75,-5.08) a18(2.75,-6.35) a19(2.75,-7.62) a20(2.75,-8.89) a21(2.75,-10.16) a22(2.75,-11.43) a23(2.75,-12.7) a24(2.75,-13.97) a25(2.75,-15.24) b1(-2.75,15.24) b2(-2.75,13.97) b3(-2.75,12.7) b4(-2.75,11.43) b5(-2.75,10.16) b6(-2.75,8.89) b7(-2.75,7.62) b8(-2.75,6.35) b9(-2.75,5.08) b10(-2.75,3.81) b11(-2.75,2.54) b12(-2.75,1.27) b13(-2.75,0) b14(-2.75,-1.27) b15(-2.75,-2.54) b16(-2.75,-3.81) b17(-2.75,-5.08) b18(-2.75,-6.35) b19(-2.75,-7.62) b20(-2.75,-8.89) b21(-2.75,-10.16) b22(-2.75,-11.43) b23(-2.75,-12.7) b24(-2.75,-13.97) b25(-2.75,-15.24)
  silkscreen extent -3.97,-18.57 3.97,19.27
"FlatCable2x5 2MM Right Angle TH FCI 98614-G61-10ULF" [mm] "FlatCable2x5 2MM Right Angle TH FCI 98614-G61-10ULF"
  rrect25% 1.2x1.7 hole 0.8: 1(4,1)
  oval 1.2x1.7 hole 0.8: 2(4,-1) 3(2,1) 4(2,-1) 5(0,1) 6(0,-1) 7(-2,1) 8(-2,-1) 9(-4,1) 10(-4,-1)
  silkscreen extent -7.8,-7.5 7.8,2.1, body extent -6,-7.2 6,1.3, height 6.1
"FlatCable2x10 2.54MM RIGHT ANGLE TH" [mm] "FlatCable2x10 2.54MM Right Angle TH, DIN 41651, Generic"
  oct 2x2 hole 1: 1(11.43,1.27)
  rrect50% 2x2 hole 1: 2(11.43,-1.27) 3(8.89,1.27) 4(8.89,-1.27) 5(6.35,1.27) 6(6.35,-1.27) 7(3.81,1.27) 8(3.81,-1.27) 9(1.27,1.27) 10(1.27,-1.27) 11(-1.27,1.27) 12(-1.27,-1.27) 13(-3.81,1.27) 14(-3.81,-1.27) 15(-6.35,1.27) 16(-6.35,-1.27) 17(-8.89,1.27) 18(-8.89,-1.27) 19(-11.43,1.27) 20(-11.43,-1.27)
  silkscreen extent -16.64,-10.67 16.64,2.54, body extent -16.51,-10.54 16.51,1.57, height 9.2
"LED Dialight 568-0721-111" [mm] "3mm LED CBI  Circuit Board Indicator  QUAD-LEVEL"
  round 1.7 hole 1: 1(0,-1.27) 2(0,1.27) 3(2.54,-1.27) 4(2.54,1.27) 5(5.08,-1.27) 6(5.08,1.27) 7(7.62,-1.27) 8(7.62,1.27)
  silkscreen extent -7.4,-2.2 8.8,2.2, body extent -9.6,-2.2 8.8,2.2, height 12.7
LED-569-010X-XXX [mil]
  round 60 hole 31.5: 1(543.75,66) 2(443.75,66) 3(343.75,66) 4(243.75,66) 5(543.75,-66) 6(443.75,-66) 7(343.75,-66) 8(243.75,-66)
  silkscreen extent -162,-144 600,144
"PQFP176 P0.5 C24.2X24.2 H1.5" [mm]
  rect 6.8x8.1 smd: 0(0,0)
  rrect50% 1.25x0.25 smd: 1(-12.625,10.75) 2(-12.625,10.25) 3(-12.625,9.75) 4(-12.625,9.25) 5(-12.625,8.75) 6(-12.625,8.25) 7(-12.625,7.75) 8(-12.625,7.25) 9(-12.625,6.75) 10(-12.625,6.25) 11(-12.625,5.75) 12(-12.625,5.25) 13(-12.625,4.75) 14(-12.625,4.25) 15(-12.625,3.75) 16(-12.625,3.25) 17(-12.625,2.75) 18(-12.625,2.25) 19(-12.625,1.75) 20(-12.625,1.25) 21(-12.625,0.75) 22(-12.625,0.25) 23(-12.625,-0.25) 24(-12.625,-0.75) 25(-12.625,-1.25) 26(-12.625,-1.75) 27(-12.625,-2.25) 28(-12.625,-2.75) 29(-12.625,-3.25) 30(-12.625,-3.75) 31(-12.625,-4.25) 32(-12.625,-4.75) 33(-12.625,-5.25) 34(-12.625,-5.75) 35(-12.625,-6.25) 36(-12.625,-6.75) 37(-12.625,-7.25) 38(-12.625,-7.75) 39(-12.625,-8.25) 40(-12.625,-8.75) 41(-12.625,-9.25) 42(-12.625,-9.75) 43(-12.625,-10.25) 44(-12.625,-10.75) 89(12.625,-10.75) 90(12.625,-10.25) 91(12.625,-9.75) 92(12.625,-9.25) 93(12.625,-8.75) 94(12.625,-8.25) 95(12.625,-7.75) 96(12.625,-7.25) 97(12.625,-6.75) 98(12.625,-6.25) 99(12.625,-5.75) 100(12.625,-5.25) 101(12.625,-4.75) 102(12.625,-4.25) 103(12.625,-3.75) 104(12.625,-3.25) 105(12.625,-2.75) 106(12.625,-2.25) 107(12.625,-1.75) 108(12.625,-1.25) 109(12.625,-0.75) 110(12.625,-0.25) 111(12.625,0.25) 112(12.625,0.75) 113(12.625,1.25) 114(12.625,1.75) 115(12.625,2.25) 116(12.625,2.75) 117(12.625,3.25) 118(12.625,3.75) 119(12.625,4.25) 120(12.625,4.75) 121(12.625,5.25) 122(12.625,5.75) 123(12.625,6.25) 124(12.625,6.75) 125(12.625,7.25) 126(12.625,7.75) 127(12.625,8.25) 128(12.625,8.75) 129(12.625,9.25) 130(12.625,9.75) 131(12.625,10.25) 132(12.625,10.75)
  rrect50% 0.25x1.25 smd: 45(-10.75,-12.625) 46(-10.25,-12.625) 47(-9.75,-12.625) 48(-9.25,-12.625) 49(-8.75,-12.625) 50(-8.25,-12.625) 51(-7.75,-12.625) 52(-7.25,-12.625) 53(-6.75,-12.625) 54(-6.25,-12.625) 55(-5.75,-12.625) 56(-5.25,-12.625) 57(-4.75,-12.625) 58(-4.25,-12.625) 59(-3.75,-12.625) 60(-3.25,-12.625) 61(-2.75,-12.625) 62(-2.25,-12.625) 63(-1.75,-12.625) 64(-1.25,-12.625) 65(-0.75,-12.625) 66(-0.25,-12.625) 67(0.25,-12.625) 68(0.75,-12.625) 69(1.25,-12.625) 70(1.75,-12.625) 71(2.25,-12.625) 72(2.75,-12.625) 73(3.25,-12.625) 74(3.75,-12.625) 75(4.25,-12.625) 76(4.75,-12.625) 77(5.25,-12.625) 78(5.75,-12.625) 79(6.25,-12.625) 80(6.75,-12.625) 81(7.25,-12.625) 82(7.75,-12.625) 83(8.25,-12.625) 84(8.75,-12.625) 85(9.25,-12.625) 86(9.75,-12.625) 87(10.25,-12.625) 88(10.75,-12.625) 133(10.75,12.625) 134(10.25,12.625) 135(9.75,12.625) 136(9.25,12.625) 137(8.75,12.625) 138(8.25,12.625) 139(7.75,12.625) 140(7.25,12.625) 141(6.75,12.625) 142(6.25,12.625) 143(5.75,12.625) 144(5.25,12.625) 145(4.75,12.625) 146(4.25,12.625) 147(3.75,12.625) 148(3.25,12.625) 149(2.75,12.625) 150(2.25,12.625) 151(1.75,12.625) 152(1.25,12.625) 153(0.75,12.625) 154(0.25,12.625) 155(-0.25,12.625) 156(-0.75,12.625) 157(-1.25,12.625) 158(-1.75,12.625) 159(-2.25,12.625) 160(-2.75,12.625) 161(-3.25,12.625) 162(-3.75,12.625) 163(-4.25,12.625) 164(-4.75,12.625) 165(-5.25,12.625) 166(-5.75,12.625) 167(-6.25,12.625) 168(-6.75,12.625) 169(-7.25,12.625) 170(-7.75,12.625) 171(-8.25,12.625) 172(-8.75,12.625) 173(-9.25,12.625) 174(-9.75,12.625) 175(-10.25,12.625) 176(-10.75,12.625)
  silkscreen extent -12.75,-11.6 11.6,11.6, body extent -12,-12 12,12, height 1.5
"PQFP208 P0.5 C28.0X28.0 H3.7" [mm] "PQFP, 208-Leads, Body 28.00x28.00mm, Pitch 0.50mm, IPC Medium Density"
  rrect25% 1.55x0.3 smd: 1(-14.95,12.75) 2(-14.95,12.25) 3(-14.95,11.75) 4(-14.95,11.25) 5(-14.95,10.75) 6(-14.95,10.25) 7(-14.95,9.75) 8(-14.95,9.25) 9(-14.95,8.75) 10(-14.95,8.25) 11(-14.95,7.75) 12(-14.95,7.25) 13(-14.95,6.75) 14(-14.95,6.25) 15(-14.95,5.75) 16(-14.95,5.25) 17(-14.95,4.75) 18(-14.95,4.25) 19(-14.95,3.75) 20(-14.95,3.25) 21(-14.95,2.75) 22(-14.95,2.25) 23(-14.95,1.75) 24(-14.95,1.25) 25(-14.95,0.75) 26(-14.95,0.25) 27(-14.95,-0.25) 28(-14.95,-0.75) 29(-14.95,-1.25) 30(-14.95,-1.75) 31(-14.95,-2.25) 32(-14.95,-2.75) 33(-14.95,-3.25) 34(-14.95,-3.75) 35(-14.95,-4.25) 36(-14.95,-4.75) 37(-14.95,-5.25) 38(-14.95,-5.75) 39(-14.95,-6.25) 40(-14.95,-6.75) 41(-14.95,-7.25) 42(-14.95,-7.75) 43(-14.95,-8.25) 44(-14.95,-8.75) 45(-14.95,-9.25) 46(-14.95,-9.75) 47(-14.95,-10.25) 48(-14.95,-10.75) 49(-14.95,-11.25) 50(-14.95,-11.75) 51(-14.95,-12.25) 52(-14.95,-12.75) 105(14.95,-12.75) 106(14.95,-12.25) 107(14.95,-11.75) 108(14.95,-11.25) 109(14.95,-10.75) 110(14.95,-10.25) 111(14.95,-9.75) 112(14.95,-9.25) 113(14.95,-8.75) 114(14.95,-8.25) 115(14.95,-7.75) 116(14.95,-7.25) 117(14.95,-6.75) 118(14.95,-6.25) 119(14.95,-5.75) 120(14.95,-5.25) 121(14.95,-4.75) 122(14.95,-4.25) 123(14.95,-3.75) 124(14.95,-3.25) 125(14.95,-2.75) 126(14.95,-2.25) 127(14.95,-1.75) 128(14.95,-1.25) 129(14.95,-0.75) 130(14.95,-0.25) 131(14.95,0.25) 132(14.95,0.75) 133(14.95,1.25) 134(14.95,1.75) 135(14.95,2.25) 136(14.95,2.75) 137(14.95,3.25) 138(14.95,3.75) 139(14.95,4.25) 140(14.95,4.75) 141(14.95,5.25) 142(14.95,5.75) 143(14.95,6.25) 144(14.95,6.75) 145(14.95,7.25) 146(14.95,7.75) 147(14.95,8.25) 148(14.95,8.75) 149(14.95,9.25) 150(14.95,9.75) 151(14.95,10.25) 152(14.95,10.75) 153(14.95,11.25) 154(14.95,11.75) 155(14.95,12.25) 156(14.95,12.75)
  rrect25% 0.3x1.55 smd: 53(-12.75,-14.95) 54(-12.25,-14.95) 55(-11.75,-14.95) 56(-11.25,-14.95) 57(-10.75,-14.95) 58(-10.25,-14.95) 59(-9.75,-14.95) 60(-9.25,-14.95) 61(-8.75,-14.95) 62(-8.25,-14.95) 63(-7.75,-14.95) 64(-7.25,-14.95) 65(-6.75,-14.95) 66(-6.25,-14.95) 67(-5.75,-14.95) 68(-5.25,-14.95) 69(-4.75,-14.95) 70(-4.25,-14.95) 71(-3.75,-14.95) 72(-3.25,-14.95) 73(-2.75,-14.95) 74(-2.25,-14.95) 75(-1.75,-14.95) 76(-1.25,-14.95) 77(-0.75,-14.95) 78(-0.25,-14.95) 79(0.25,-14.95) 80(0.75,-14.95) 81(1.25,-14.95) 82(1.75,-14.95) 83(2.25,-14.95) 84(2.75,-14.95) 85(3.25,-14.95) 86(3.75,-14.95) 87(4.25,-14.95) 88(4.75,-14.95) 89(5.25,-14.95) 90(5.75,-14.95) 91(6.25,-14.95) 92(6.75,-14.95) 93(7.25,-14.95) 94(7.75,-14.95) 95(8.25,-14.95) 96(8.75,-14.95) 97(9.25,-14.95) 98(9.75,-14.95) 99(10.25,-14.95) 100(10.75,-14.95) 101(11.25,-14.95) 102(11.75,-14.95) 103(12.25,-14.95) 104(12.75,-14.95) 157(12.75,14.95) 158(12.25,14.95) 159(11.75,14.95) 160(11.25,14.95) 161(10.75,14.95) 162(10.25,14.95) 163(9.75,14.95) 164(9.25,14.95) 165(8.75,14.95) 166(8.25,14.95) 167(7.75,14.95) 168(7.25,14.95) 169(6.75,14.95) 170(6.25,14.95) 171(5.75,14.95) 172(5.25,14.95) 173(4.75,14.95) 174(4.25,14.95) 175(3.75,14.95) 176(3.25,14.95) 177(2.75,14.95) 178(2.25,14.95) 179(1.75,14.95) 180(1.25,14.95) 181(0.75,14.95) 182(0.25,14.95) 183(-0.25,14.95) 184(-0.75,14.95) 185(-1.25,14.95) 186(-1.75,14.95) 187(-2.25,14.95) 188(-2.75,14.95) 189(-3.25,14.95) 190(-3.75,14.95) 191(-4.25,14.95) 192(-4.75,14.95) 193(-5.25,14.95) 194(-5.75,14.95) 195(-6.25,14.95) 196(-6.75,14.95) 197(-7.25,14.95) 198(-7.75,14.95) 199(-8.25,14.95) 200(-8.75,14.95) 201(-9.25,14.95) 202(-9.75,14.95) 203(-10.25,14.95) 204(-10.75,14.95) 205(-11.25,14.95) 206(-11.75,14.95) 207(-12.25,14.95) 208(-12.75,14.95)
  silkscreen extent -15.07,-13.77 13.77,13.78, body extent -14,-14 14,14, height 3.7
"Push Button C7.1x3.7 TE FSMRA4JH" [mm] "Push Button C7.1x3.7 TE FSMRA4JH"
  round 1.8 hole 1.2: 0(-3.5,5.1) 0(3.5,5.1)
  round 1.5 hole 0.9: 1(-2.25,2.6) 2(2.25,2.6)
  silkscreen extent -3.6,0 3.6,3.7, body extent -3.7,-5.75 3.7,6.6, height 7
PUSHBUTTON-03_PUSHBUTT-SH3-01(Primary) [mil]
  round 80 hole 39.37: 4(0,200) 5(200,200) C(100,0) NC(0,0) NO(200,0)
  silkscreen extent -50,-50 250,700
RJ45-PULSE-J8064D628ANL [mil]
  round 60 hole 35.43: 1(-450,675) 2(-400,775) 3(-350,675) 4(-300,775) 5(-250,675) 6(-200,775) 7(-150,675) 8(-100,775) 13(100,675) 14(150,775) 15(200,675) 16(250,775) 17(300,675) 18(350,775) 19(400,675) 20(450,775)
  round 70 hole 39.37: 9(-531.25,262.5) 10(-431.25,262.5) 11(-118.75,262.5) 12(-18.75,262.5) 21(18.75,337.5) 22(118.75,337.5) 23(431.25,262.5) 24(531.25,262.5)
  round 100 hole 63: 25(-609,545) 26(0,830) 27(609,545)
  round 125.98 hole 125.98 paste-1000 mask-1000: 28(-500,425) 29(500,425)
  silkscreen extent -669,-13 669,888
"SMA TH Right Angle Linx CONSMA002" [mm] "Connector SMA TH Right Angle Linx CONSMA002"
  round 2.5 hole 1.5: 1(0,0) 2(-2.55,-2.55) 2(-2.55,2.55) 2(2.55,-2.55) 2(2.55,2.55)
  silkscreen extent -11.9,-3.7 3.7,3.7, body extent -11.71,-3.5 3.5,3.5, height 10
SW-CTS-193-4MS [mm]
  rect 1.2x2.6 smd: 1(0,0) 2(2.54,0) 3(5.08,0) 4(7.62,0) 5(7.62,8.89) 6(5.08,8.89) 7(2.54,8.89) 8(0,8.89)
  silkscreen extent -2.7,-1.91 10.32,10.48
"UNCONNECTED NUT M2.5" [mm]
  round 3 hole 3 paste-25.4 mask-25.4: 1(0,0)
  Top Layer keep-out region: -3.5,0 -3.031,-1.75 -1.75,-3.031 0,-3.5 1.75,-3.031 3.031,-1.75 3.5,0 3.031,1.75 1.75,3.031 0,3.5 -1.75,3.031 -3.031,1.75
  Bottom Layer keep-out region: -3.5,0 -3.031,-1.75 -1.75,-3.031 0,-3.5 1.75,-3.031 3.031,-1.75 3.5,0 3.031,1.75 1.75,3.031 0,3.5 -1.75,3.031 -3.031,1.75
  silkscreen extent -3,-3 3,3
"USB-B TH AMPHENOL UE27-BC54-130" [mm] "USB-B TH AMPHENOL UE27-BC54-130"
  rrect50% 1.7x1.7 hole 1: 1(1.25,15)
  round 1.7 hole 1: 2(-1.25,15) 3(-1.25,12.3) 4(1.25,12.3)
  round 3.81 hole 2.3: 5(-6.05,10.3) 6(6.05,10.3)
  silkscreen extent -6.2,-0.2 6.2,16.7, body extent -6.3,-0.1 6.3,16.5, height 10.6
USB-MINI-B-SMD [mm]
  rect 2.25x0.5 smd: 1(8.225,1.6) 2(8.225,0.8) 3(8.225,0) 4(8.225,-0.8) 5(8.225,-1.6)
  rect 3.5x2.05 smd: 6(8.25,-4.925) 8(8.25,4.925)
  rect 4x2.05 smd: 7(4,-4.925) 9(4,4.925)
  round 0.9 hole 0.9 paste-25.4 mask-25.4: 10(5.9,2.2) 11(5.9,-2.2)
  Top Layer keep-out lines w0.254: 2,-3.1 2,3.1 3.2,3.1 3.2,-3.1 2,-3.1
  silkscreen extent -0.3,-6.2 10.2,6.2
XFL4020 [mm] "Inductor, 2-Leads, Body 4.0x4.0mm, Height 2.1mm Coilcraft XFL4020"
  rect 1x3.4 smd: 1(-1.2,0) 2(1.2,0)
  silkscreen extent -2.3,-2.3 2.3,2.3, body extent -2,-2 2,2, height 2.1